# Altium PCB TSAL_Inverters.PcbDoc (part 2 of 2)
Units mm, origin at the board's own origin, x right, y up, seen from the top; angles counter-clockwise.
Board outline 68 x 46 mm, 2 copper layers (Top Layer, Bottom Layer), stack 1.57 mm thick; 50 components, 20 nets, 115 pads, 25 vias.
Unrouted connection lines stored in the file: 1.
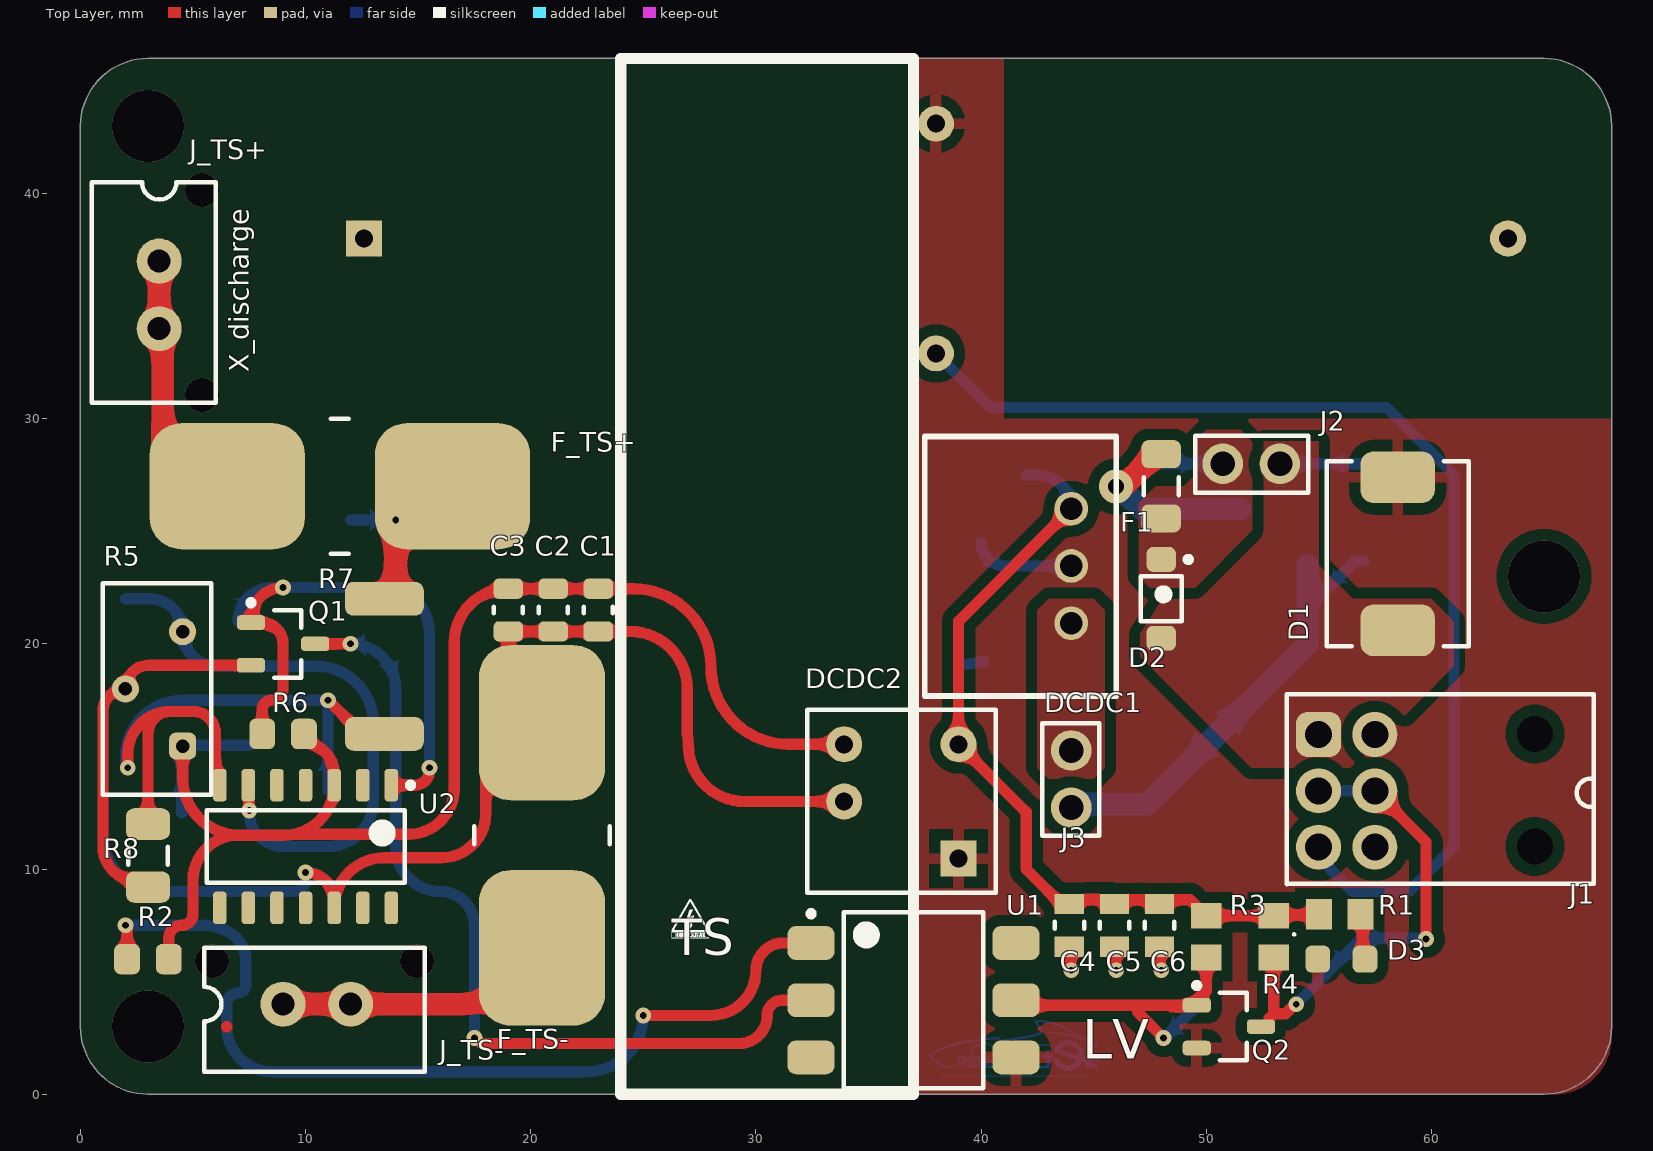
[diagram p0: Top Layer view]

## Via types
v1: diameter 0.7, hole 0.3, Top Layer to Bottom Layer, tented both sides, 14 vias
v2: diameter 1.5, hole 1.5, Top Layer to Bottom Layer, 4 vias
v3: diameter 0.7, hole 0.3, Top Layer to Bottom Layer, tented bottom, 3 vias
v4: diameter 3.2, hole 3.2, Top Layer to Bottom Layer, 3 vias
v5: diameter 1.5, hole 0.7, Top Layer to Bottom Layer, tented both sides, 1 vias

## Nets (pads, with @x,y where several pads share a name; then routed paths per layer and width w, separated by ;. In a path a pad name is that pad's centre, name@x,y a point inside that pad or via, vN(x,y) a via of type N, cw(c..) or ccw(c..) an arc to the next point about the centre after c; other vN are vias at no path point) (continued)
+12: (continued)
  Top Layer w0.5: DCDC1.3 39,21 DCDC2.3 42,12.54 42,10 43.35,8.65 43.92,8.65 45.905,8.65 45.92,8.636 47.92,8.636 49.282,8.636 49.575,8.343 49.575,8.25 49.9,7.925 R4.2 53.038,7.963 R1.2@55.15,7.963
  Bottom Layer w0.5: TP4.1 42.5,27.5 cw(c42.5,26) DCDC1.3
GND: C4.2 C5.2 C6.2 C7.1 C8.1 D1.1 D3.K DCDC1.2 DCDC2.1 J1.4 Q2.S TP7.1 U1.4 X_discharge.3 | length 7.8
  Top Layer w0.5: C4.2 43.962,6.508 43.962,5.538 v1(44,5.5) ; C5.2 45.962,6.508 45.962,5.538 v1(46,5.5) ; C6.2 47.92,5.58 v1(48,5.5)
  Bottom Layer w0.5: TP7.1 ccw(c41.04,24.5) 41.04,23.46 DCDC1.2
Inv_Red_ON: J1.2 J1.5 Q2.D R4.1 TP12.1 | length 21.7
  Top Layer w0.5: Q2.D 52.725,3 52.8,3.075 52.8,3.375 53,3.575 ; R4.1@53.1,6.075 R4.1 53,3.575 ; v1(54,4) 53.946,4 53.521,3.575 53,3.575 ; J1.5@57.707,13.475 57.707,13.253 59.756,11.204 v1(59.756,6.89)
  Bottom Layer w0.5: v1(54,4) 55.336,5.336 55.336,5.367 56.858,6.89 56.89,6.89 56.928,6.928 59.718,6.928 v1(59.756,6.89) ; J1.2 J1.5
LV+_in: D1.2 D2.A J1.1 J2.1 TP2.1 | length 3.8
  Bottom Layer w0.5: J2.1 TP2.1 TP2.1@57.043,28
NetC7_2: C7.2 F1.2 J3.1 L1.1 TP3.1 | length 28.9
  Top Layer w1: v5(45.988,26.994) 46.083,27.089 46.414,27.089 47.75,28.425 F1.2
  Bottom Layer w0.5: 54.5,21.575 56.6,23.675 C7.2
  Bottom Layer w1: J3.1 44.153,12.883 47.383,12.883 48,13.5 54.5,20 54.5,21.575 54.5,23.5 ; v5(45.988,26.994) 46.123,26.994 47.117,26 51.5,26
NetC8_2: C8.2 DCDC1.1 J3.2 L1.2 TP6.1 | length 0.8
  Bottom Layer w0.5: C8.2@39.314,19.083 C8.2@40.15,19.227
NetD2_K: D2.K F1.1 J2.2 TP5.1 | length 2.7
  Bottom Layer w0.5: TP5.1 J2.2
NetD3_A: D3.A R1.1 | length 2.1
  Top Layer w0.5: R1.1@56.875,8.025 R1.1 56.95,7.9 56.95,6.1 D3.A
NetF_TS+_2: F_TS+.2 J_TS+.1 J_TS+.2 | length 12.1
  Top Layer w1: J_TS+.1 J_TS+.2 3.65,33.85 3.65,28.731 5.881,26.5 F_TS+.2@6.025,26.5 ; F_TS+.2@5.015,27 F_TS+.2@5.475,27
NetF_TS-_2: F_TS-.2 J_TS-.1 J_TS-.2 | length 11.9
  Top Layer w1: J_TS-.1 J_TS-.2 17,4 ccw(c17,6.5) F_TS-.2@19.5,6.5
NetQ1_D: Q1.D TP9.1 U1.2 | length 38.4
  Top Layer w0.5: Q1.D v1(12,20) ; v1(17.5,2.5) 17.554,2.5 17.804,2.25 29.25,2.25 ccw(c29.25,3.5) 30.5,3.5 cw(c31.175,3.5) 31.175,4.175 U1.2
  Bottom Layer w0.5: v1(12,20) cw(c12,18) 14,18 14,11 ccw(c16,11) 16,9 cw(c16,7.5) 17.5,7.5 v1(17.5,2.5)
NetQ1_G: Q1.G R6.1 TP10.1 U2.1 | length 27.5
  Top Layer w0.5: R6.1 8.075,17.075 cw(c8.5,17.075) 8.5,17.5 ccw(c8.5,18) 9,18 9,20 ccw(c8.05,20) 8.05,20.95 Q1.G 7.575,21.075 cw(c9,21.075) v1(9,22.5) ; U2.1 14.86,13.725 ccw(c14.86,14.365) 15.5,14.365 v1(15.5,14.5)
  Bottom Layer w0.5: TP10.1 cw(c8.5,21) 8.5,22.5 v1(9,22.5) 13.5,22.5 cw(c13.5,20.5) 15.5,20.5 v1(15.5,14.5)
NetQ2_G: Q2.G R3.1 TP11.1 U1.5 | length 15
  Top Layer w0.5: U1.5 41.775,3.95 46.95,3.95 ; v1(48.1,2.5) 46.95,3.65 46.95,3.95 ; 48.466,3.875 Q2.G@49.425,3.875 ; Q2.G@49.462,4.063 50,4.6 R3.1 ; Q2.G 46.95,3.95
  Bottom Layer w0.5: v1(48.1,2.5) 48.154,2.5 TP11.1@49.327,3.673
NetR2_1: R2.1 U1.1 | length 41.6
  Top Layer w0.5: v1(2,7.5) cw(c2,7.425) 2.075,7.425 R2.1 ; 6.5,2.984 6.5,2.989 ccw(c6.001,3) 6.501,3 ; v3(25,3.5) 28,3.5 ccw(c28,5.5) 30,5.5 cw(c31.215,5.5) 31.215,6.715 U1.1
  Bottom Layer w0.5: v1(2,7.5) 5.5,7.5 cw(c5.5,5.654) 6.195,7.364 ccw(c6.381,7.828) 6.247,7.347 cw(c5.85,5.9) 7.345,5.782 ccw(c7.844,5.744) 7.344,5.727 cw(c5.5,5.654) 7.346,5.654 7.346,4.846 cw(c7,4.846) 7,4.5 ccw(c7,4) 6.5,4 6.5,2.999 ccw(c8.5,3) 8.5,1 22.5,1 ccw(c22.5,3.5) v3(25,3.5) v3@24.962,3.462
NetR5_3: R5.3 TP14.1 U2.6 | length 26.4
  Top Layer w0.5: U2.6 cw(c7.46,13.685) 7.5,13.685 v1(7.5,12.6)
  Bottom Layer w0.5: TP14.1 3.08,22 cw(c3.08,20.54) R5.3 ccw(c6.08,20.54) 6.08,19 10.5,19 cw(c10.5,16.5) 13,16.5 13,13 cw(c11,13) 11,11 9,11 cw(c9,12.5) 7.5,12.5 v1(7.5,12.6)
NetR7_1: R7.1 R8.2 TP15.1 U2.7 | length 32.2
  Top Layer w0.5: v1(2.1,14.5) 2.1,15.1 cw(c4,15.1) 4,17 ; R8.2 3,16 cw(c4,16) 4,17 ; U2.7 cw(c6.19,13.915) 6,13.915 6,16 ccw(c5,16) 5,17 4,17 ; v1(11,17.5) 12.5,16 R7.1
  Bottom Layer w0.5: v1(2.1,14.5) 2,14.5 2,14.96 cw(c4.54,14.96) 4.54,17.5 v1(11,17.5) TP15.1
SC_End: J1.3 X_discharge.4 | length 49.7
  Bottom Layer w0.5: X_discharge.4 40.4,30.5 58,30.5 61,27.5 61,11 59,9 56.5,9 55.492,10.008 55.492,10.062 54.985,10.569 J1.3
TS+: F_TS+.1 R7.2 TP13.1 | length 11.1
  Top Layer w0.5: R7.2 R7.2@14.5,22
  Top Layer w1: R7.2@14,22 13.988,22.012 13.988,24.963 14.263,25.237 F_TS+.1@15.75,26.725 ; v3(14,25.5) 15.5,27 F_TS+.1@16.025,27
  Bottom Layer w0.5: TP13.1 v3(14,25.5)
TS-: C1.2 C2.2 C3.2 DCDC2.5 F_TS-.1 Q1.S R5.2 R8.1 U2.12 | length 76.3
  Top Layer w0.5: R8.1@2.557,9.455 2.275,9.481 2.273,9.481 cw(c2.557,11.011) 1,11.011 1,17 cw(c2,17) R5.2 cw(c3.05,18) 3.05,19.05 Q1.S ; v3(10,9.85) cw(c10,8.58) 11.27,8.58 U2.12 cw(c13.495,8.275) 13.495,10.5 16.036,10.5 ccw(c16.036,12.464) 17.956,12.05 ccw(c16.036,12.464) 18,12.464 18,14 cw(c20.5,14) 19.969,16.443 19.997,16.446 20.045,16.451 F_TS-.1 ; F_TS-.1@19.5,16.442 cw(c20.04,13.96) F_TS-.1@20.04,16.5 ; F_TS-.1@19.5,16.5 cw(c19.5,17) 19,17 C3.2 C2.2 C1.2 24.414,20.55 cw(c24.414,18.01) 26.954,18.01 26.954,15.991 cw(c24.46,15.51) 27,15.51 27,15.5 ccw(c29.5,15.5) 29.5,13 DCDC2.5
  Bottom Layer w0.5: R5.2 ccw(c2,17) 1,17 1,11.5 ccw(c3.5,11.5) 3.5,9 9.5,9 ccw(c9.5,9.5) 10,9.5 v3(10,9.85)
pads on no net: J1.6 J1.7 U1.3 U1.6 U2.2 U2.4 U2.5 U2.8 U2.9 U2.10 U2.11 U2.13 U2.14 X_discharge.1 X_discharge.2
copper on no net:
  other v2: 5.85,5.9 14.95,5.9 5.4,31.05 5.4,40.15
  other v4: 3,3 65,23 3,43

## Polygon pours and split planes (outlines as drawn)
GND on Top Layer "GND_L01_P026" (solid, pour order 26): 37,46 41,46 41,30 37,30
LV+_in on Top Layer "LV+_IN_L01_P022" (solid, pour order 22): 52.5,29 55,29 55,23.5 56.5,22 60,22 61,21 61,19 59.5,17.5 56.5,14.5 52,14.5 47.072,19.428 47.072,20.443
NetD2_K on Top Layer "NETD2_K_L01_P019" (solid, pour order 19): 47,26.5 47,23 47.5,22.5 49.5,22.5 52.036,25.036 52.036,28.964 51.5,29.5 50,29.5 49.5,29 49.5,27.5 49,27 47.5,27
GND on Top Layer "GND_L01_P024" (solid, remove dead copper, pour order 24): 36.99,0 65.45,0 ccw(c65.45,2.54) 67.99,2.54 67.99,30 36.99,30
NetC8_2 on Top Layer "NETC8_2_L01_P020" (solid, pour order 20): 43,22 45,22 45.5,21.5 45.5,14.5 45,14 43,14 42.5,14.5 42.5,21.5
GND on Bottom Layer "GND_L02_P027" (solid, pour order 27): 36.99,46 40.99,46 40.99,30 36.99,30
NetC8_2 on Bottom Layer "NETC8_2_L02_P021" (solid, pour order 21): 43.5,22 48,22 49,21 49,18 45,14 38,14 37,15 37,18.5 38,19.5 41,19.5 43,21.5
GND on Bottom Layer "GND_L02_P025" (solid, remove dead copper, pour order 25): 37,0 65.46,0 ccw(c65.46,2.54) 68,2.54 68,30 37,30
NetC7_2 on Bottom Layer "NETC7_2_L02_P023" (solid, pour order 23): 51.5,27 51,26.5 51,24 53,22 59,22 59.5,22.5 59.5,24.5 59,25 55.5,25 53.5,27

## Other copper
Bottom Layer:
  drawing of 15 lines, arcs and shapes, not listed

## Silkscreen, mask and mechanical layers (free items; w line width, h text height)
Top Overlay:
  drawing of 17 lines, arcs and shapes, not listed
  text "TS" at 26.254,5.635 h2.78
  text "LV" at 44.503,1 h3
Bottom Overlay:
  drawing of 17 lines, arcs and shapes, not listed
  text "LV" at 42.497,10.5 h3
  text "TS" at 19.498,9.838 h7.08
  text "TSAL Inverters" at 49.997,6.5 h3
  text "David Redondo - 2022" at 49.998,5 h2
Mechanical 1:
  the board outline again, w0.5

## Dimensions
37,30 to 24,30 on Bottom Overlay
24,46 to 37,46 on Top Overlay